# Altium PCB B202AA-PCIe.PcbDoc
Units mm, origin at the board's own origin, x right, y up, seen from the top; angles counter-clockwise.
Board outline 30 x 50.95 mm, 4 copper layers (Top Layer, Int1, Int2, Bottom Layer), stack 1.547 mm thick; 65 components, 43 nets, 237 pads, 132 vias.
Unrouted connection lines stored in the file: 196.
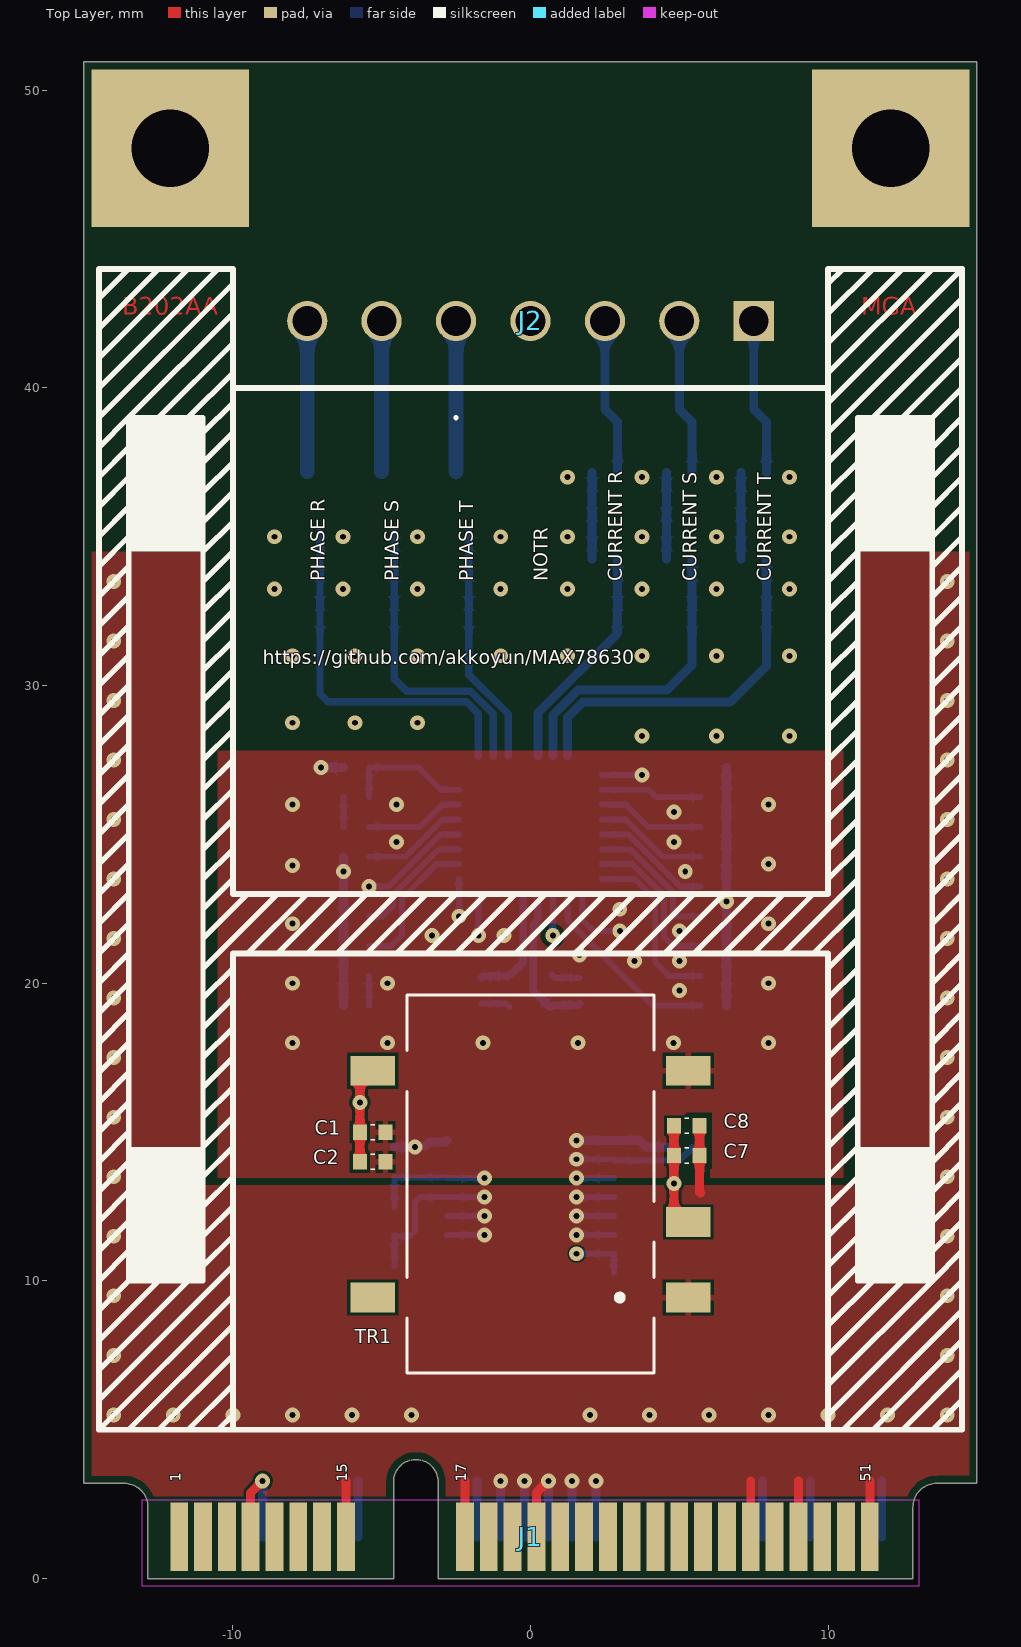
[diagram p0: Top Layer view]
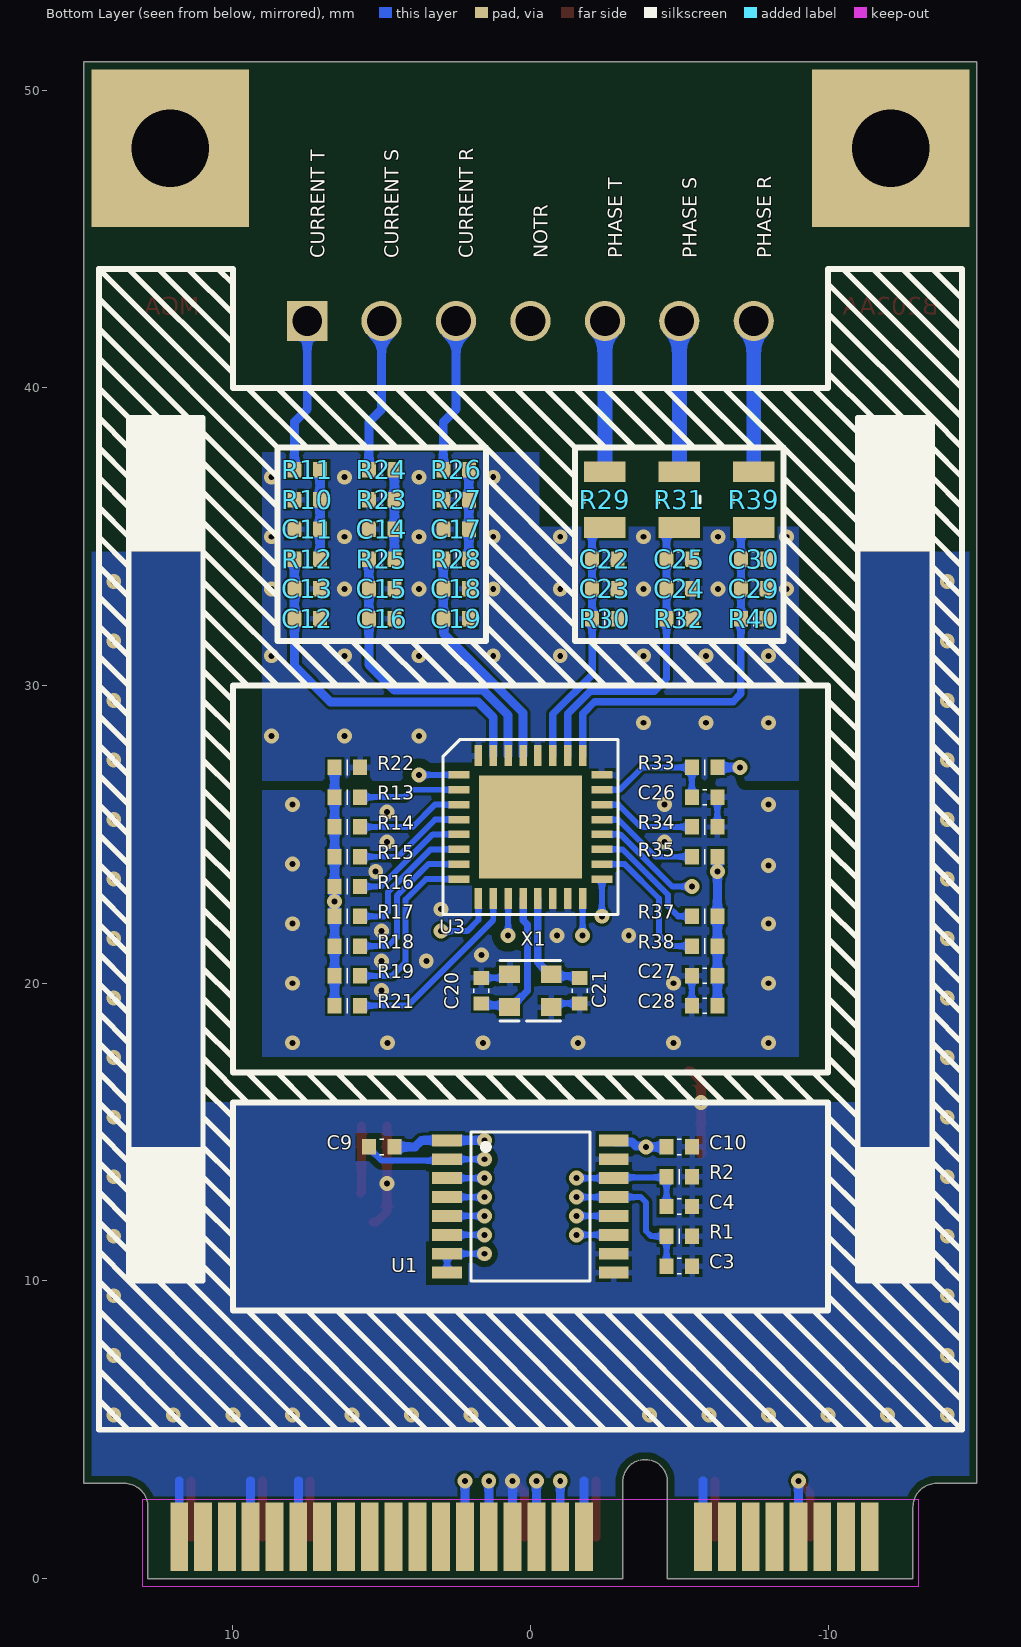
[diagram p1: Bottom Layer view, seen from below]
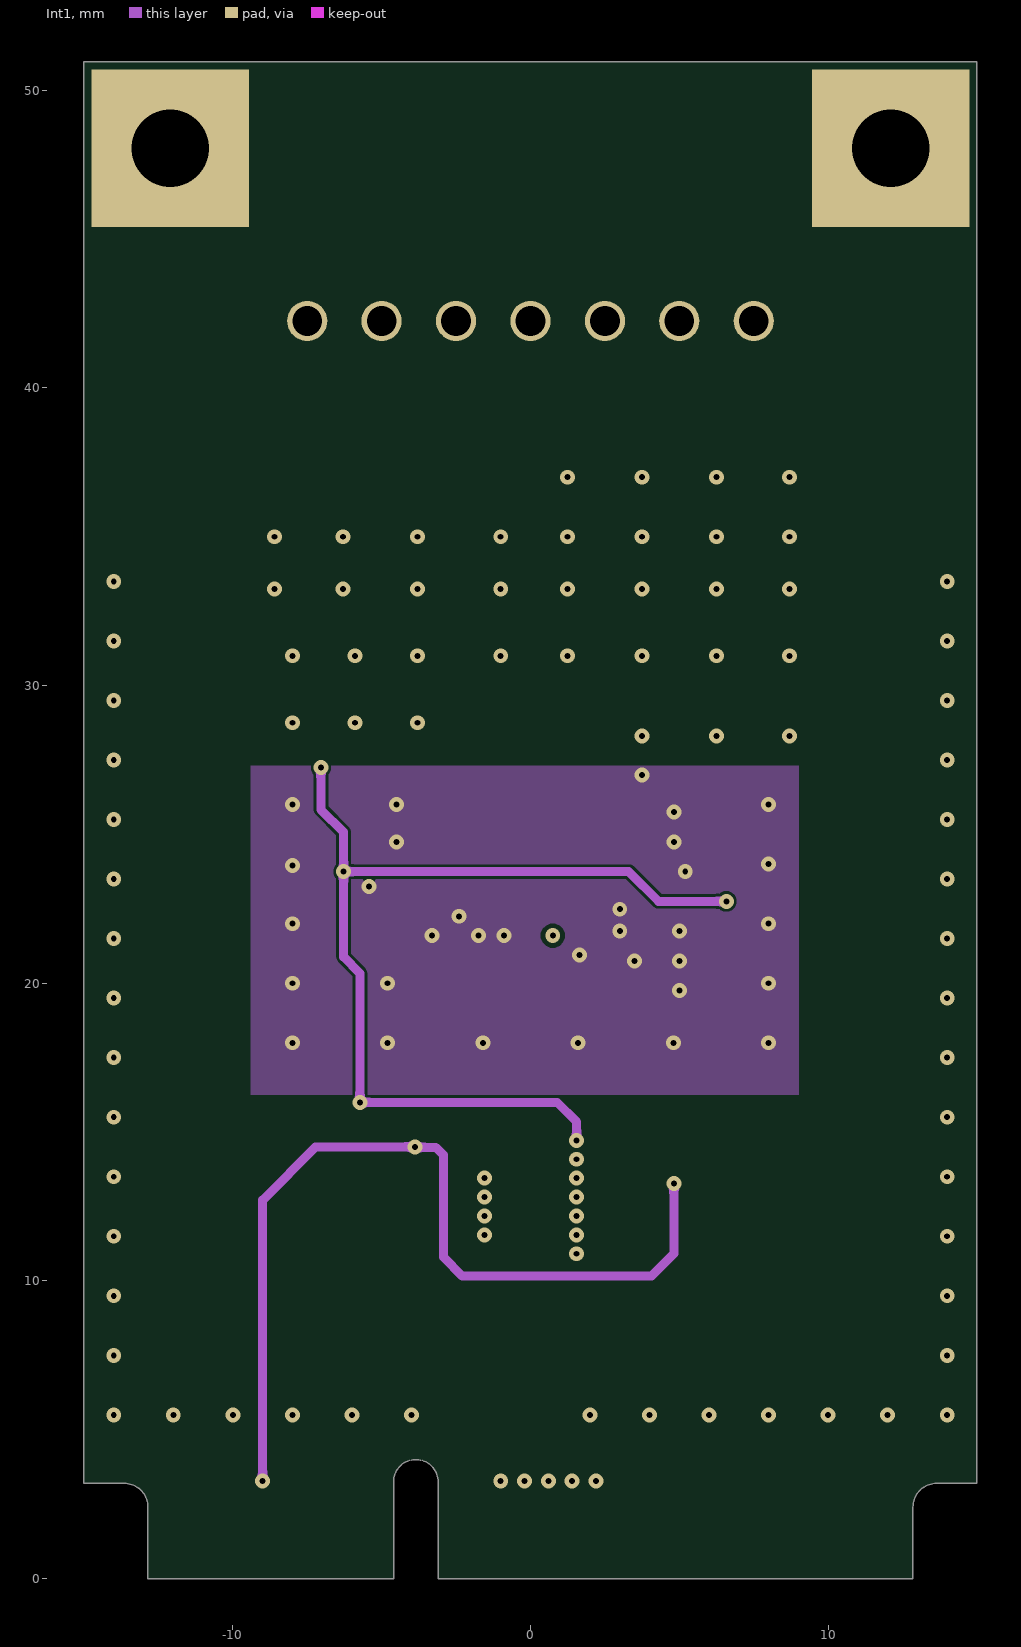
[diagram p2: Int1]
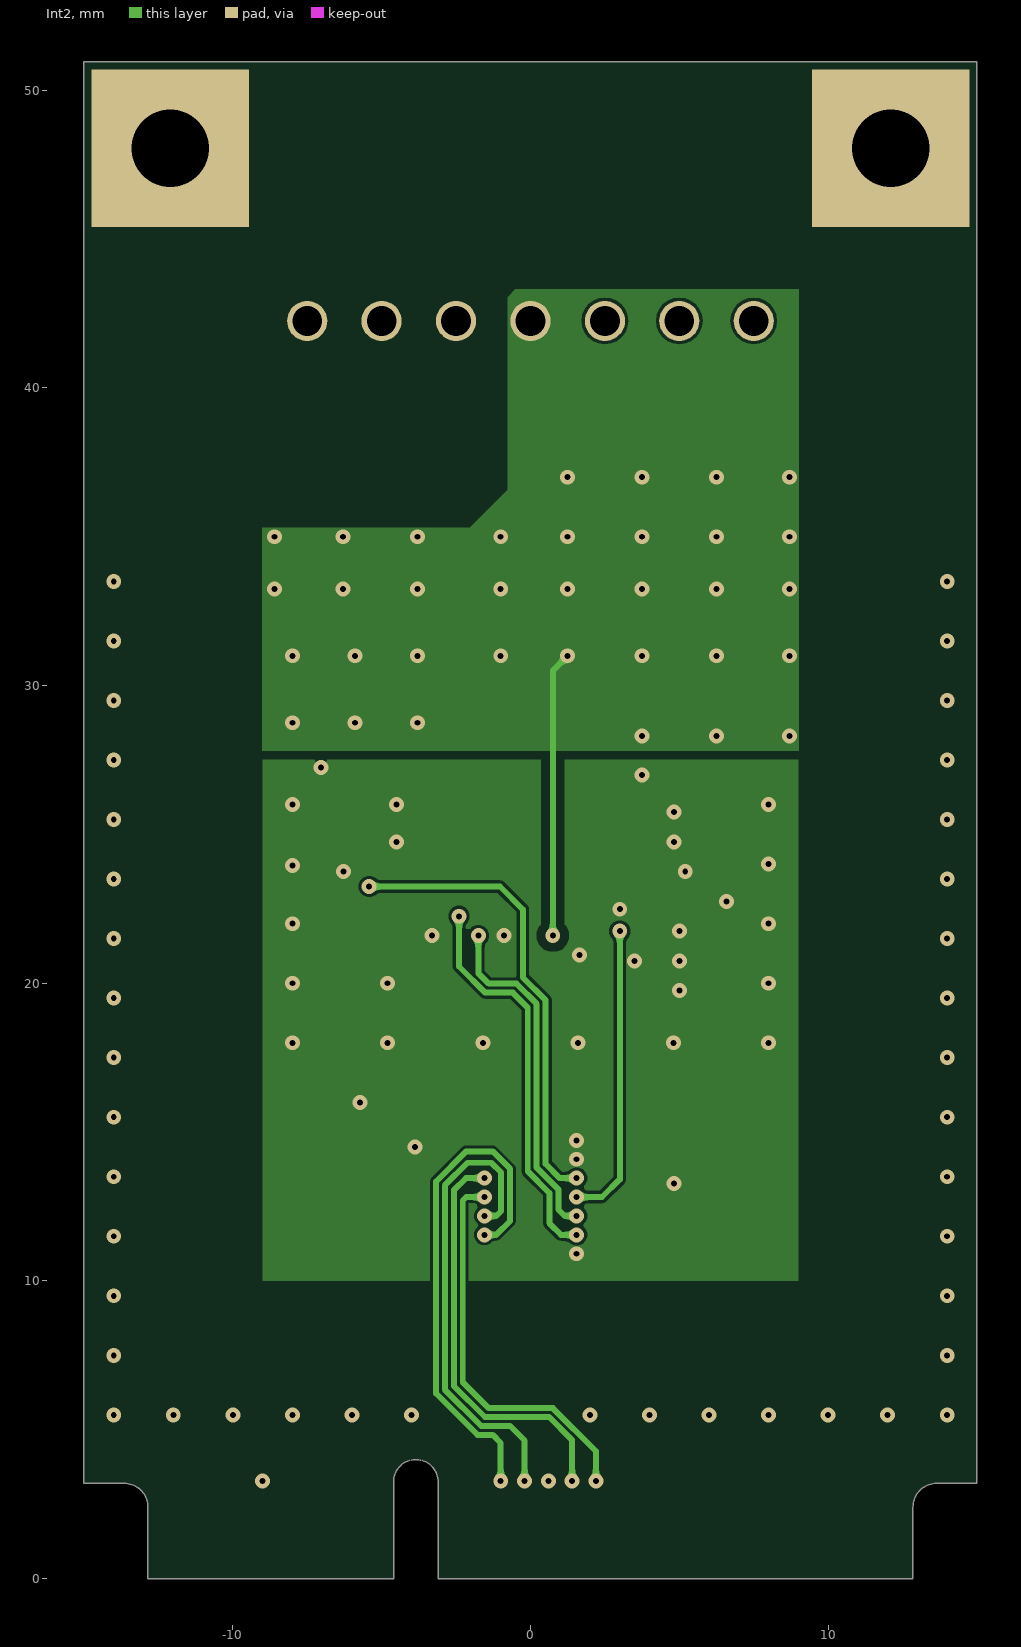
[diagram p3: Int2]
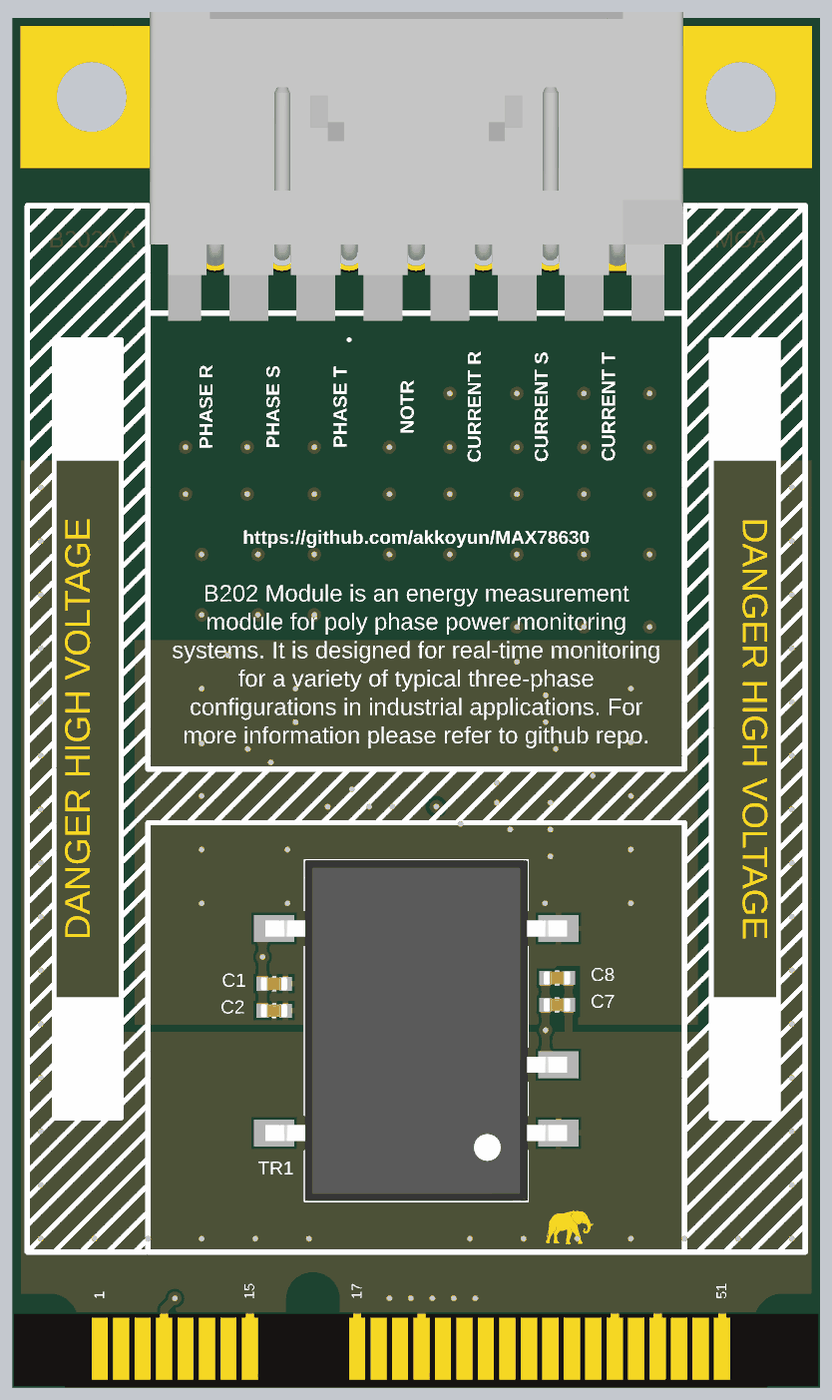
[diagram p4: 3D render of the assembled board from above, using the file's embedded part models]
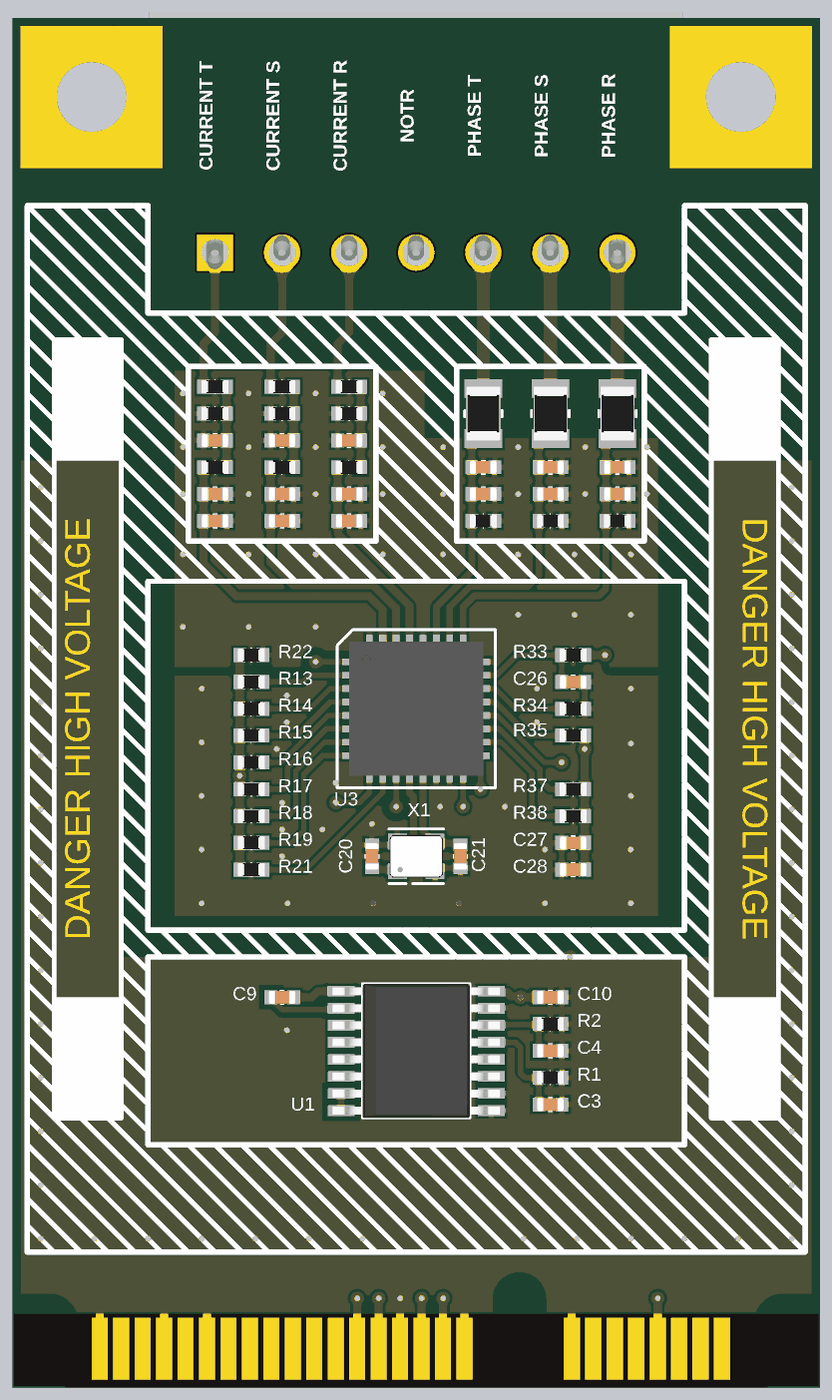
[diagram p5: 3D render of the assembled board from below, using the file's embedded part models]

## Layer stack, top to bottom
Top Solder: solder mask 0.0254, SM-001, Dk 4
Top Layer: signal copper 0.035
Dielectric 1: prepreg 0.2083, PP-022, Dk 4.5
Int1: signal copper 0.035
Dielectric 3: core 0.9906, Core-042, Dk 4.6
Int2: signal copper 0.035
Dielectric 5: prepreg 0.2083, PP-022, Dk 4.5
Bottom Layer: signal copper 0.035
Bottom Solder: solder mask 0.0254, SM-001, Dk 4

## Board outline
-12.85,0 -12.85,2.4 ccw(c-13.65,2.4) -13.65,3.2 -15,3.2 -15,50.95 15,50.95 15,3.2 13.65,3.2 ccw(c13.65,2.4) 12.85,2.4 12.85,0 -3.1,0 -3.1,3.25 ccw(c-3.85,3.25) -4.6,3.25 -4.6,0

## Design rules (kind name [scope] priority, off if disabled: settings)
BoardOutlineClearance [All] p1: gap=0.25 ignorepadtopadclearanceinfootprint=FALSE except(0: Arc-SplitContinuation Track-SplitContinuation SMDPad-SplitContinuation THPad-SplitContinuation Via-SplitContinuation Fill-SplitContinuation Poly-SplitContinuation Region-SplitContinuation Text-SplitContinuation)
Clearance NOTR-GNDISO [InNet('NOTR') vs InNet('GNDISO')] p1: gap=0.3 ignorepadtopadclearanceinfootprint=TRUE
Clearance GND-GNDISO [InNet('GND') vs InNet('GNDISO')] p2: gap=0.2 ignorepadtopadclearanceinfootprint=TRUE
Clearance "HV Clearence" [InNetClass('HV')] p3: gap=0.1 ignorepadtopadclearanceinfootprint=TRUE except(0: Arc-Hole Track-Hole SMDPad-Hole THPad-Hole Via-Hole Fill-Hole Poly-Hole Region-Hole Text-Hole; 1: THPad-Fill THPad-Poly THPad-Region; 1.2: Arc-Arc Arc-Track Track-Track; 1.5: Arc-Fill Arc-Poly Arc-Region Track-Fill Track-Poly Track-Region SMDPad-Fill SMDPad-Poly SMDPad-Region)
Clearance [All] p4: gap=0.1 ignorepadtopadclearanceinfootprint=FALSE except(0: Arc-Hole Track-Hole SMDPad-Hole THPad-Hole Via-Hole Fill-Hole Poly-Hole Region-Hole Text-Hole)
ComponentClearance [All] p1: gap=0.25 collisioncheckmode=3 verticalgap=0.25 showdistances=FALSE
DiffPairsRouting [All] p1: maxlimit=0.25 minlimit=0.25 mostfreqgap=0.25 toplayer_minwidth=0.381 toplayer_maxwidth=0.381 toplayer_prefwidth=0.381 midlayer1_minwidth=0.381 midlayer1_maxwidth=0.381 midlayer1_prefwidth=0.381 midlayer2_minwidth=0.381 midlayer2_maxwidth=0.381 midlayer2_prefwidth=0.381 bottomlayer_minwidth=0.381 bottomlayer_maxwidth=0.381 bottomlayer_prefwidth=0.381 maxuncoupledlength=12.5
Height [All] p1: minheight=0 maxheight=25 prefheight=12.5
HoleSize HoleSize-PTH [All] p1: absolutevalues=TRUE maxlimit=5 minlimit=0.15 maxpercent=80.000 minpercent=20.000
HoleToHoleClearance [All] p1: gap=0.35 allowstackedmicrovias=TRUE
MinimumAnnularRing "Minimum IAR  <= 0.45mm" [((ObjectKind = 'Pad') OR (ObjectKind = 'Via')) And (Layer = 'MultiLayer') And (HoleDiameter <= AsMM(0.45))] p1: minimumring=0.125 // minimum inner annular ring for pads <= 0.45mm finished hole size
MinimumAnnularRing "Minimum IAR  > 0.45mm" [((ObjectKind = 'Pad') OR (ObjectKind = 'Via')) And (Layer = 'MultiLayer') And (HoleDiameter > AsMM(0.45))] p2: minimumring=0.125 // minimum inner annular ring for pads > 0.45mm finished hole size
MinimumAnnularRing Minimum-IAR [All] p3: minimumring=0.125
MinimumSolderMaskSliver [All] p1: minsoldermaskwidth=0.08
PlaneClearance [InNet('ANT_GSM')] p1: clearance=0.05
PlaneClearance PlaneClearance-IPI [All] p2: clearance=0.25
PlaneConnect [All] p1: planeconnectstyle=Relief reliefexpansion=0.175 reliefentries=4 reliefconductorwidth=0.2 reliefairgap=0.1
PolygonConnect PolygonConnect_Via [All vs (ObjectKind = 'Via') And (HoleDiameter <= AsMM(0.45))] p1: connectstyle=Direct reliefconductorwidth=0.254 reliefentries=4 polygonreliefangle="90 Angle" airgapwidth=0.254
PolygonConnect PolygonConnect-xTW [All] p2: connectstyle=Relief reliefconductorwidth=0.2 reliefentries=4 polygonreliefangle="90 Angle" airgapwidth=0.1
RoutingCorners [All] p1: cornerstyle=45-Degree minsetback=2.5 maxsetback=2.5
RoutingVias "RoutingVias <= 0.45mm" [(ObjectKind = 'Via') And (HoleDiameter <= AsMM(0.45))] p1: holewidth=0.2 width=0.55 viastyle="Through Hole" minholewidth=0.15 minwidth=0.5 maxholewidth=0.45 maxwidth=0.8
RoutingVias "RoutingVias > 0.45mm" [(ObjectKind = 'Via') And (HoleDiameter > AsMM(0.45))] p2: holewidth=0.5 width=0.85 viastyle="Through Hole" minholewidth=0.5 minwidth=0.85 maxholewidth=0.9 maxwidth=1.25
SilkToSilkClearance [All] p1: silktosilkclearance=0.2
SilkToSolderMaskClearance SilkscreenOverComponentPads [IsPad] p1: minsilkscreentomaskgap=0.1 clearancetoexposedcopper=TRUE
SolderMaskExpansion SolderMaskExpansion_Via [(ObjectKind = 'Via') And (HoleDiameter <= AsMM(0.45))] p1: expansion=0.01 istentingtop=TRUE soldermaskfromhole=TRUE
SolderMaskExpansion [All] p2: expansion=0.01 istentingtop=FALSE
SupplyNets VT [InNetClass('HV')] p1: voltage=220,0
SupplyNets 3V3 [InNet('3V3')] p2: voltage=3,300
SupplyNets 3V3ISO [InNet('3V3ISO')] p3: voltage=3,300
UnRoutedNet [All] p1: checkbadconnections=TRUE
Width Width-xTW [All] p1: maxlimit=1.5 minlimit=0.1 preferedwidth=0.2
18 further rules are at their usual default settings.

## Classes and differential pairs
net class Analog_Voltage: Analog_VR Analog_VS Analog_VT
component class "MAX78630 SOC": C20 C21 C26 C27 C28 R13 R14 R15 R16 R17 R18 R19 R21 R22 R33 R34 R35 R37 R38 U3 X1
net class HV: VR VS VT
component class "Serial Comm Isolation": C3 C4 C9 C10 R1 R2 U1
component class "Voltage Dividers": C22 C23 C24 C25 C29 C30 R29 R30 R31 R32 R39 R40
component class "DC/DC Isolation": C1 C2 C7 C8
component class "Current Voltage Dividers": C11 C12 C13 C14 C15 C16 C17 C18 C19 R10 R11 R12 R23 R24 R25 R26 R27 R28
component class "Card Edge Connector": J1
component class "3 Phase Energy Inputs": J2

## Components (designator, comment, footprint, x,y, rotation, side; value= is the part's Value field where it differs from the comment)
C1 "Capacitor - 4.7uF [0402] (Ceramic)" CAPACITOR_0402 -5.3,15 r180 top value=4.7uF
C2 "Capacitor - 100nF [0402] (Ceramic)" CAPACITOR_0402 -5.3,14 r180 top value=100nF
C3 "Capacitor - 100nF [0402] (Ceramic)" CAPACITOR_0402 -5,10.5 r0 bottom value=100nF
C4 "Capacitor - 100nF [0402] (Ceramic)" CAPACITOR_0402 -5,12.5 r0 bottom value=100nF
C7 "Capacitor - 100nF [0402] (Ceramic)" CAPACITOR_0402 5.25,14.213 r180 top value=100nF
C8 "Capacitor - 100nF [0402] (Ceramic)" CAPACITOR_0402 5.25,15.213 r180 top value=100nF
C9 "Capacitor - 100nF [0402] (Ceramic)" CAPACITOR_0402 5,14.5 r180 bottom value=100nF
C10 "Capacitor - 100nF [0402] (Ceramic)" CAPACITOR_0402 -5,14.5 r0 bottom value=100nF
C11 "Capacitor - 100nF [0402] (Ceramic)" CAPACITOR_0402 7.5,35.25 r180 bottom value=100nF
C12 "Capacitor - 1nF [0402] (Ceramic)" CAPACITOR_0402 7.5,32.25 r0 bottom value=1nF
C13 "Capacitor - 47nF [0402] (Ceramic)" CAPACITOR_0402 7.5,33.25 r0 bottom value=47nF
C14 "Capacitor - 100nF [0402] (Ceramic)" CAPACITOR_0402 5,35.25 r180 bottom value=100nF
C15 "Capacitor - 47nF [0402] (Ceramic)" CAPACITOR_0402 5,33.25 r0 bottom value=47nF
C16 "Capacitor - 1nF [0402] (Ceramic)" CAPACITOR_0402 5,32.25 r0 bottom value=1nF
C17 "Capacitor - 100nF [0402] (Ceramic)" CAPACITOR_0402 2.5,35.25 r180 bottom value=100nF
C18 "Capacitor - 47nF [0402] (Ceramic)" CAPACITOR_0402 2.5,33.25 r0 bottom value=47nF
C19 "Capacitor - 1nF [0402] (Ceramic)" CAPACITOR_0402 2.5,32.25 r0 bottom value=1nF
C20 "Capacitor - 8pF [0402] (Ceramic)" CAPACITOR_0402 1.65,19.75 r270 bottom value=8pF
C21 "Capacitor - 8pF [0402] (Ceramic)" CAPACITOR_0402 -1.65,19.75 r90 bottom value=8pF
C22 "Capacitor - 1nF [0402] (Ceramic)" CAPACITOR_0402 -2.5,34.25 r0 bottom value=1nF
C23 "Capacitor - 100nF [0402] (Ceramic)" CAPACITOR_0402 -2.5,33.25 r0 bottom value=100nF
C24 "Capacitor - 100nF [0402] (Ceramic)" CAPACITOR_0402 -5,33.25 r0 bottom value=100nF
C25 "Capacitor - 1nF [0402] (Ceramic)" CAPACITOR_0402 -5,34.25 r0 bottom value=1nF
C26 "Capacitor - 100nF [0402] (Ceramic)" CAPACITOR_0402 -5.85,26.25 r0 bottom value=100nF
C27 "Capacitor - 100nF [0402] (Ceramic)" CAPACITOR_0402 -5.85,20.25 r180 bottom value=100nF
C28 "Capacitor - 100nF [0402] (Ceramic)" CAPACITOR_0402 -5.85,19.25 r180 bottom value=100nF
C29 "Capacitor - 100nF [0402] (Ceramic)" CAPACITOR_0402 -7.5,33.25 r0 bottom value=100nF
C30 "Capacitor - 1nF [0402] (Ceramic)" CAPACITOR_0402 -7.5,34.25 r0 bottom value=1nF
J1 "Connector - Mini PCI-E (Male B202AA-PCIe)" "PCB - Mini PCI Express" -3.85,3.25 r0 top
J2 "53426-0710" "Connector 7P (2.54)" 0,42.25 r180 top locked
R1 "10K - 0402 - %1 - 1/16W" RESISTOR_0402 -5,11.5 r0 bottom value=10K
R2 "10K - 0402 - %1 - 1/16W" RESISTOR_0402 -5,13.5 r0 bottom value=10K
R10 "4R99 - 0402 - %1 - 1/16W" RESISTOR_0402 7.5,36.25 r180 bottom value=4R99
R11 "0R - 0402 - %1 - 1/16W" RESISTOR_0402 7.5,37.25 r0 bottom value=0R
R12 "750R - 0402 - %1 - 1/16W" RESISTOR_0402 7.5,34.25 r180 bottom value=750R
R13 "10K - 0402 - %1 - 1/16W" RESISTOR_0402 6.15,26.25 r180 bottom value=10K
R14 "10K - 0402 - %1 - 1/16W" RESISTOR_0402 6.15,25.25 r0 bottom value=10K
R15 "10K - 0402 - %1 - 1/16W" RESISTOR_0402 6.15,24.25 r180 bottom value=10K
R16 "10K - 0402 - %1 - 1/16W" RESISTOR_0402 6.15,23.25 r180 bottom value=10K
R17 "10K - 0402 - %1 - 1/16W" RESISTOR_0402 6.15,22.25 r0 bottom value=10K
R18 "10K - 0402 - %1 - 1/16W" RESISTOR_0402 6.15,21.25 r180 bottom value=10K
R19 "10K - 0402 - %1 - 1/16W" RESISTOR_0402 6.15,20.25 r180 bottom value=10K
R21 "10K - 0402 - %1 - 1/16W" RESISTOR_0402 6.15,19.25 r180 bottom value=10K
R22 "0R - 0402 - %1 - 1/16W" RESISTOR_0402 6.15,27.25 r0 bottom value=0R
R23 "4R99 - 0402 - %1 - 1/16W" RESISTOR_0402 5,36.25 r180 bottom value=4R99
R24 "0R - 0402 - %1 - 1/16W" RESISTOR_0402 5,37.25 r0 bottom value=0R
R25 "750R - 0402 - %1 - 1/16W" RESISTOR_0402 5,34.25 r180 bottom value=750R
R26 "0R - 0402 - %1 - 1/16W" RESISTOR_0402 2.5,37.25 r0 bottom value=0R
R27 "4R99 - 0402 - %1 - 1/16W" RESISTOR_0402 2.5,36.25 r180 bottom value=4R99
R28 "750R - 0402 - %1 - 1/16W" RESISTOR_0402 2.5,34.25 r180 bottom value=750R
R29 "2M - 0805 - %0.1 - 1/5W" RESISTOR_0805 -2.5,36.25 r90 bottom value=2M
R30 "750R - 0402 - %0.1 - 1/16W" RESISTOR_0402 -2.5,32.25 r0 bottom value=750R
R31 "2M - 0805 - %0.1 - 1/5W" RESISTOR_0805 -5,36.25 r90 bottom value=2M
R32 "750R - 0402 - %0.1 - 1/16W" RESISTOR_0402 -5,32.25 r0 bottom value=750R
R33 "10K - 0402 - %1 - 1/16W" RESISTOR_0402 -5.85,27.25 r0 bottom value=10K
R34 "10K - 0402 - %1 - 1/16W" RESISTOR_0402 -5.85,25.25 r0 bottom value=10K
R35 "10K - 0402 - %1 - 1/16W" RESISTOR_0402 -5.85,24.25 r0 bottom value=10K
R37 "10K - 0402 - %1 - 1/16W" RESISTOR_0402 -5.85,22.25 r0 bottom value=10K
R38 "10K - 0402 - %1 - 1/16W" RESISTOR_0402 -5.85,21.25 r180 bottom value=10K
R39 "2M - 0805 - %0.1 - 1/5W" RESISTOR_0805 -7.5,36.25 r90 bottom value=2M
R40 "750R - 0402 - %0.1 - 1/16W" RESISTOR_0402 -7.5,32.25 r0 bottom value=750R
TR1 "PDS1-S3-S3-M" PDS1-Sx-Sx-M 0,13.25 r180 top locked
U1 "ISO7041" SSOP-16 0,12.5 r180 bottom
U3 "MAX78630+PPM/D00" "TQFN-32 - Maxim" 0,25.25 r270 bottom
X1 "CX2016DB20000D0GPSC1" "CRYSTAL - 20MHz" 0,19.75 r90 bottom

## Footprints (in the part's own frame and the unit in brackets; to place one, negate y for a bottom-side part, rotate by r counter-clockwise, add the part's x,y. Pads: shape width x height; smd on the part's side, far side on the other; paste and mask are expansions set on the pad)
CAPACITOR_0402 [mm] "Chip Capacitor, IPC High Density"
  rect 0.47x0.52 smd mask+0.01: 1(-0.43,0) 2(0.43,0)
  silkscreen extent -0.06,-0.25 0.06,0.25, body extent -0.5,-0.25 0.5,0.25, height 0.49
"Connector 7P (2.54)" [mm] "7P Tunic Connector"
  rect 1.35x1.35 / inner round 1.35 / far side rect 1.35x1.35 hole 1 mask+0.076: 1(-7.5,0)
  round 1.35 hole 1 mask+0.076: 2(-5,0) 3(-2.5,0) 4(0,0) 5(2.5,0) 6(5,0) 7(7.5,0)
  body extent -9.96,-8.96 9.94,2.54, height 6.65
"CRYSTAL - 20MHz" [mm] "X2016DB20000D0FLJCC"
  rect 0.6x0.7 smd mask+0.01: 1(-0.55,0.7) 2(-0.55,-0.7) 3(0.55,-0.7) 4(0.55,0.7)
  silkscreen extent -1.02,-1.02 1.02,1.02, body extent -0.8,-1 0.8,1, height 0.4
"PCB - Mini PCI Express" [mm]
  rect 0.6x2.3 smd paste-0.9: 1(-7.95,-1.85) 3(-7.15,-1.85) 5(-6.35,-1.85) 7(-5.55,-1.85) 9(-4.75,-1.85) 11(-3.95,-1.85) 13(-3.15,-1.85) 15(-2.35,-1.85) 17(1.65,-1.85) 19(2.45,-1.85) 21(3.25,-1.85) 23(4.05,-1.85) 25(4.85,-1.85) 27(5.65,-1.85) 29(6.45,-1.85) 31(7.25,-1.85) 33(8.05,-1.85) 35(8.85,-1.85) 37(9.65,-1.85) 39(10.45,-1.85) 41(11.25,-1.85) 43(12.05,-1.85) 45(12.85,-1.85) 47(13.65,-1.85) 49(14.45,-1.85) 51(15.25,-1.85)
  rect 0.6x2.3 smd far side paste-0.9: 2(-7.55,-1.85) 4(-6.75,-1.85) 6(-5.95,-1.85) 8(-5.15,-1.85) 10(-4.35,-1.85) 12(-3.55,-1.85) 14(-2.75,-1.85) 16(-1.95,-1.85) 18(2.05,-1.85) 20(2.85,-1.85) 22(3.65,-1.85) 24(4.45,-1.85) 26(5.25,-1.85) 28(6.05,-1.85) 30(6.85,-1.85) 32(7.65,-1.85) 34(8.45,-1.85) 36(9.25,-1.85) 38(10.05,-1.85) 40(10.85,-1.85) 42(11.65,-1.85) 44(12.45,-1.85) 46(13.25,-1.85) 48(14.05,-1.85) 50(14.85,-1.85) 52(15.65,-1.85)
  Top Layer keep-out region: -9.2,-0.6 16.9,-0.6 16.9,-3.5 -9.2,-3.5
  Bottom Layer keep-out region: -9.2,-0.6 16.9,-0.6 16.9,-3.5 -9.2,-3.5
PDS1-Sx-Sx-M [mm] "Voltage Isolator"
  rect 1.5x1 smd mask+0.01: 1(-5.3,3.81) 2(-5.3,1.27) 4(-5.3,-3.81) 5(5.3,-3.81) 8(5.3,3.81)
  silkscreen extent -4.15,-6.35 4.15,6.35, body extent -5.62,-6.35 5.62,6.35, height 7.3
RESISTOR_0402 [mm] "Chip Resistor, IPC High Density"
  rect 0.47x0.52 smd mask+0.01: 1(-0.43,0) 2(0.43,0)
  silkscreen extent 0,-0.25 0,0.25, body extent -0.5,-0.25 0.5,0.25, height 0.35
RESISTOR_0805 [mm] "Chip Resistor, IPC High Density"
  rect 0.7x1.4 smd mask+0.01: 1(-0.935,0) 2(0.935,0)
  silkscreen extent -0.12,-0.7 0.12,0.7, body extent -1,-0.63 1,0.63, height 0.45
SSOP-16 [mm]
  rect 1x0.4 smd mask+0.01: 1(-2.8,2.223) 2(-2.8,1.588) 3(-2.8,0.953) 4(-2.8,0.318) 5(-2.8,-0.318) 6(-2.8,-0.953) 7(-2.8,-1.588) 8(-2.8,-2.223) 9(2.8,-2.223) 10(2.8,-1.588) 11(2.8,-0.953) 12(2.8,-0.318) 13(2.8,0.317) 14(2.8,0.953) 15(2.8,1.588) 16(2.8,2.223)
  silkscreen extent -2,-2.5 2,2.5, body extent -3.13,-2.5 3.13,2.5, height 1.75
"TQFN-32 - Maxim" [mm]
  rect 0.25x0.7 smd mask+0.01: 1(-1.75,-2.4) 2(-1.25,-2.4) 3(-0.75,-2.4) 4(-0.25,-2.4) 5(0.25,-2.4) 6(0.75,-2.4) 7(1.25,-2.4) 8(1.75,-2.4) 17(1.75,2.4) 18(1.25,2.4) 19(0.75,2.4) 20(0.25,2.4) 21(-0.25,2.4) 22(-0.75,2.4) 23(-1.25,2.4) 24(-1.75,2.4)
  rect 0.7x0.25 smd mask+0.01: 9(2.4,-1.75) 10(2.4,-1.25) 11(2.4,-0.75) 12(2.4,-0.25) 13(2.4,0.25) 14(2.4,0.75) 15(2.4,1.25) 16(2.4,1.75) 25(-2.4,1.75) 26(-2.4,1.25) 27(-2.4,0.75) 28(-2.4,0.25) 29(-2.4,-0.25) 30(-2.4,-0.75) 31(-2.4,-1.25) 32(-2.4,-1.75)
  rect 3.45x3.45 smd mask+0.01: EP(0,0)
  silkscreen extent -2.95,-2.95 2.95,2.95, body extent -2.5,-2.5 2.5,2.5, height 0.9

## Part data
C1: library part "Capacitor - 4.7uF [0402-6V3]", "Multilayer Ceramic Capacitors - SMD - 6V3 4.7uF X5R 0402 20%", Case=0402, Manufacturer Name=KEMET, Manufacturer Part Number=C0402C475M9PACTU, Tolerance=20%, Voltage=6V3
C2 C3 C4 C7 C8 C9 C10 C11 C14 C17 C23 C24 C26 C27 C28 C29: library part "Capacitor - 100nF [0402-6V3]", "Capacitor - 100nF [0402-6V3] (Ceramic)", Case=0402, Manufacturer Name=AVX, Manufacturer Part Number=04026D104KAT4A, Tolerance=%10, Voltage=6V3, ComponentLink1Description=Mouser, ComponentLink1URL=https://www.mouser.com.tr/ProductDetail/AVX/04026D104KAT4A?qs=sGAEpiMZZMs0AnBnWHyRQPg4iYkCw7IMED%2F4kpqgf7w%3D, ComponentLink2Description=DataSheet, ComponentLink2URL=https://www.mouser.com.tr/datasheet/2/40/cx5r-776519.pdf
C12 C16 C19 C22 C25 C30: library part "Capacitor - 1nF [0402-6V3]", Case=0402, Manufacturer Name=AVX, Manufacturer Part Number=04026C102MAT2A, Tolerance=20%, Voltage=6V3, ComponentLink1Description=DataSheet, ComponentLink1URL=https://www.mouser.com.tr/datasheet/2/40/X7RDielectric-777024.pdf
C13 C15 C18: library part "Capacitor - 47nF [0402-6V3]", "Multilayer Ceramic Capacitors - SMD - 6.3V 47nF X7R 0402 10%", Case=0402, Manufacturer Name=AVX, Manufacturer Part Number=04026C473KAT2A, Tolerance=10%, Voltage=6V3
C20 C21: library part "Capacitor - 8pF [0402-50V]", Case=0402, Manufacturer Name="KYOCERA AVX", Manufacturer Part Number=04025A8R0CAT2A, Tolerance=0.25pF, Voltage=50V
J1: "Mini PCI-Express gold finger connector.", BUS Type="Mini PCI Express", Mating Connector="TE 2041262-1", Number of Positions=52, Pitch="0.8 mm", System=Connector
J2: library part "Connector - Tunic 7P (2.5)", "2.50mm Pitch Mini-Lock Wire-to-Board Header Right Angle Friction and Positive Lock 7 Circuits", Case=TH, Manufacturer Name=Molex, Manufacturer Part Number=53426-0710, Pitch=2.5mm, Position="7 Position", System=Connector
R1 R2 R13 R14 R15 R16 R17 R18 R19 R21 R33 R34 R35 R37 R38: library part "Resistor - 10K [0402]", "Thick Film Resistors - SMD 1/16 W 10 KOhm 1%", Case=0402, Manufacturer Name=Vishay, Manufacturer Part Number=CRCW040210K0FKED, Power=1/16W, Tolerance=%1, ComponentLink1Description=DataSheet, ComponentLink1URL=https://www.mouser.com.tr/datasheet/2/427/dcrcwe3-1762152.pdf, ComponentLink2Description=Mouser, ComponentLink2URL=https://www.mouser.com.tr/ProductDetail/Vishay-Dale/CRCW040210K0FKED?qs=sGAEpiMZZMu61qfTUdNhG2DpbjADlD3GcalbOv9utCY%3D
R10 R23 R27: library part "Resistor - 4R99 [0402]", "Thick Film Resistors - SMD 1/16 W 33 Ohm 1%", Case=0402, Manufacturer Name=Bourns, Manufacturer Part Number=CRT0402-FZ-4R99GLF, Power=1/16W, Tolerance=%1, ComponentLink1Description=DataSheet, ComponentLink1URL=https://www.mouser.com.tr/datasheet/2/427/dcrcwe3-1762152.pdf, ComponentLink2Description=Mouser, ComponentLink2URL=https://www.mouser.com.tr/ProductDetail/Vishay-Dale/CRCW0402330RFKED?qs=sGAEpiMZZMu61qfTUdNhG2DpbjADlD3GGS6SwBlLi5Q%3D
R11 R22 R24 R26: library part "Resistor - 0R [0402]", "Thick Film Resistors - SMD 1/16 W 0 Ohm", Case=0402, Manufacturer Name=Vishay, Manufacturer Part Number=CRCW04020000Z0ED, Power=1/16W, ComponentLink1Description=DataSheet, ComponentLink1URL=https://www.mouser.com.tr/datasheet/2/427/dcrcwe3-1762152.pdf, ComponentLink2Description=Mouser, ComponentLink2URL=https://www.mouser.com.tr/ProductDetail/Vishay-Dale/CRCW04020000Z0ED?qs=sGAEpiMZZMu61qfTUdNhG2DpbjADlD3GG34cJb50zyg%3D
R12 R25 R28: library part "Resistor - 750R [0402]", "Thick Film Resistors - SMD 1/16 W 750 Ohm 1%", Case=0402, Manufacturer Name=Vishay, Manufacturer Part Number=CRCW0402750RFKED, Power=1/16W, Tolerance=%1, ComponentLink1Description=DataSheet, ComponentLink1URL=https://www.mouser.com.tr/datasheet/2/427/dcrcwe3-1762152.pdf, ComponentLink2Description=Mouser, ComponentLink2URL=https://www.mouser.com.tr/ProductDetail/Vishay-Dale/CRCW0402330RFKED?qs=sGAEpiMZZMu61qfTUdNhG2DpbjADlD3GGS6SwBlLi5Q%3D
R29 R31 R39: library part "Resistor - 2M [0805] %0.1", "Thick Film Resistors - SMD 1/5 W 2 MOhm 0.1%", Case=0805, Manufacturer Name=Vishay, Manufacturer Part Number=MCU0805MD2004BP500, Power=1/5W, Tolerance=%0.1, ComponentLink1Description=DataSheet, ComponentLink1URL=https://www.mouser.com.tr/datasheet/2/427/dcrcwe3-1762152.pdf, ComponentLink2Description=Mouser, ComponentLink2URL=https://www.mouser.com.tr/ProductDetail/Vishay-Dale/CRCW0402330RFKED?qs=sGAEpiMZZMu61qfTUdNhG2DpbjADlD3GGS6SwBlLi5Q%3D
R30 R32 R40: library part "Resistor - 750R [0402] %0.1", "Thick Film Resistors - SMD 1/16 W 750 Ohm 0.1%", Case=0402, Manufacturer Name=Vishay, Manufacturer Part Number=MCS04020D7500BE000, Power=1/16W, Tolerance=%0.1, ComponentLink1Description=DataSheet, ComponentLink1URL=https://www.mouser.com.tr/datasheet/2/427/dcrcwe3-1762152.pdf, ComponentLink2Description=Mouser, ComponentLink2URL=https://www.mouser.com.tr/ProductDetail/Vishay-Dale/CRCW0402330RFKED?qs=sGAEpiMZZMu61qfTUdNhG2DpbjADlD3GGS6SwBlLi5Q%3D
TR1: library part "Transformator - PDS1-Sx-Sx-M", "Module DC-DC 3.3VIN 1-OUT 3.3V 0.303A 1W 5-Pin SMD Module", Case=SMD, Manufacturer Name="CUI Inc.", Output Current="303 mA", Output Voltage=3V3, Manufacturer Part Number=PDS1-S3-S3-M
U1: library part "IC - ISO7041", "Digital Isolators Ultra-low power, ATEX/IECEx-certified, four-channel digital isolator 16-SSOP -55 to 125", Case=SSOP-16, Manufacturer Name="Texas Instruments", Manufacturer Part Number=ISO7041FDBQR, Operating Supply Current="115.7 uA", Supply Voltage - Max="3.6 V", Supply Voltage - Min="2.25 V", Isolation Voltage="3000 Vrms", Isolation Type="Capacitive Coupling"
U3: library part "IC - MAX78630", "Energy Measurement Processor 32-Pin TQFN EP Tube", Case=TQFN-32, Manufacturer Name=Silergy, Manufacturer Part Number=MAX78630+PPM/D00, ROHS=Yes
X1: library part "Crystal - 20MHz", "Crystals AEC-Q200 20000kHz 8pF 2x1.6mm", Case=SMD, Frequency="20 MHz", Manufacturer Name="Kyocera Electronic Components", Manufacturer Part Number=CX2016DB20000D0GPSC1

## Free pads (board coordinates)
  rect 5.3x5.3 hole 2.6: 1(-12.1,48.05) 2(12.1,48.05)

## Via types
v1: diameter 0.5, hole 0.2, Top Layer to Bottom Layer, tented both sides, 132 vias

## Nets (pads, with @x,y where several pads share a name; then routed paths per layer and width w, separated by ;. In a path a pad name is that pad's centre, name@x,y a point inside that pad or via, vN(x,y) a via of type N, cw(c..) or ccw(c..) an arc to the next point about the centre after c; other vN are vias at no path point)
3V3: C7.2 C8.2 C10.2 J1.7 J1.8 TR1.2 U1.16 | length 39.8
  Top Layer w0.3: J1.7 -9.4,2.879 v1(-9,3.279) ; C8.2 C7.2 v1(4.82,13.272) 4.82,12.33 5.17,11.98 TR1.2
  Int1 w0.3: v1(-9,3.279) -9,12.717 -7.217,14.5 v1(-3.885,14.5) -3.873,14.488 -3.185,14.488 -2.921,14.224 -2.921,10.795 -2.286,10.16 4.064,10.16 4.82,10.916 v1(4.82,13.272)
  Bottom Layer w0.3: J1.8 v1(-9,3.279) ; C10.2 v1(-3.885,14.5) -3.847,14.538 -3.538,14.538 -3.403,14.673 -2.85,14.673 U1.16
3V3_AL1: C4.2 J1.26 R2.2 U1.14 | length 19.8
  Int2 w0.2: v1(-1.55,13.453) -2.168,13.453 -2.575,13.046 -2.575,6.472 -1.529,5.426 0.627,5.426 1.4,4.653 v1(1.4,3.279)
  Bottom Layer w0.2: C4.2 R2.2 -4.547,13.477 -2.823,13.477 U1.14 v1(-1.55,13.453)
  Bottom Layer w0.3: J1.26 v1(1.4,3.279)
3V3_AL2: C3.2 J1.28 R1.2 U1.13 | length 20.3
  Int2 w0.2: v1(-1.55,12.818) -2.158,12.818 -2.275,12.7 -2.275,6.596 -1.405,5.726 0.751,5.726 2.2,4.277 v1(2.2,3.279)
  Bottom Layer w0.2: C3.2 R1.2@-4.57,11.525 ; R1.2 -4.055,11.5 -3.879,11.676 -3.879,12.642 -3.704,12.818 U1.13 v1(-1.55,12.818)
  Bottom Layer w0.3: J1.28 v1(2.2,3.279)
3V3_UART_RX: J1.20 U1.11 | length 20.3
  Int2 w0.2: v1(-1.55,11.547) -1.153,11.547 -0.685,12.015 -0.685,13.766 -1.27,14.351 -2.159,14.351 -3.175,13.335 -3.175,6.223 -1.778,4.826 -1.27,4.826 -1,4.556 v1(-1,3.279)
  Bottom Layer w0.2: U1.11 v1(-1.55,11.547)
  Bottom Layer w0.3: J1.20 v1(-1,3.279)
3V3_UART_TX: J1.22 U1.12 | length 19
  Int2 w0.2: v1(-1.55,12.182) -1.153,12.182 -0.985,12.35 -0.985,13.642 -1.313,13.97 -2.116,13.97 -2.875,13.211 -2.875,6.347 -1.654,5.126 -0.681,5.126 -0.2,4.645 v1(-0.2,3.279)
  Bottom Layer w0.2: U1.12 v1(-1.55,12.182)
  Bottom Layer w0.3: J1.22 v1(-0.2,3.279)
3V3ISO: C1.2 C2.2 C9.2 C27.2 C28.2 R13.1 R14.2 R15.1 R16.1 R17.2 R18.1 R19.1 R21.1 R22.2 R33.1 R35.1 R37.1 R38.2 TR1.5 U1.1 | length 53.1
  Top Layer w0.3: C2.2@-5.73,14.25 C1.2 v1(-5.73,16) -5.73,16.71 -5.38,17.06 TR1.5
  Int1 w0.3: v1(-7.04,27.25) -7.04,25.836 -6.28,25.076 v1(-6.28,23.75) ; v1(1.55,14.723) 1.55,15.341 0.891,16 v1(-5.73,16) -5.73,20.335 -6.28,20.885 v1(-6.28,23.75) ; v1(6.58,22.75) 4.301,22.75 3.301,23.75 v1(-6.28,23.75)
  Bottom Layer w0.3: v1(-7.04,27.25) R33.1 ; C28.2 C27.2 R38.2 R37.1 v1(-6.28,23.75) R35.1 ; v1(1.55,14.723) U1.1 3.656,14.723 3.879,14.5 C9.2 ; R21.1 R22.2
ADDR0: R38.1 U3.18 | length 4.9
  Bottom Layer w0.2: R38.1 -4.692,21.25 -4.318,21.624 -4.318,22.848 -3.166,24 U3.18
ADDR1: R17.1 U3.6 | length 4.6
  Bottom Layer w0.2: U3.6 3.353,24.5 4.791,23.062 4.791,22.387 4.928,22.25 R17.1
Analog_IR: C18.2 C19.2 R28.1 U3.29 | length 7.7
  Bottom Layer w0.3: U3.29 0.25,29.079 2.91,31.739 2.91,32.14 2.93,32.16 C18.2 R28.1
Analog_IR_: C17.2 R26.1 R27.2 R28.2 | length 2.9
  Bottom Layer w0.3: R28.2 C17.2 R26.1@2.07,37.154
Analog_IS: C15.2 C16.2 R25.1 U3.30 | length 10.3
  Bottom Layer w0.3: U3.30 0.75,29.002 1.593,29.845 4.572,29.845 5.43,30.703 C16.2 C15.2 R25.1
Analog_IS_: C14.2 R23.2 R24.1 R25.2 | length 2.9
  Bottom Layer w0.3: R25.2 C14.2 R24.1@4.57,37.154
Analog_IT: C12.2 C13.2 R12.1 U3.31 | length 12.3
  Bottom Layer w0.3: U3.31 1.25,28.936 1.759,29.445 6.712,29.445 7.93,30.663 C12.2 C13.2 R12.1
Analog_IT_: C11.2 R10.2 R11.1 R12.2 | length 2.9
  Bottom Layer w0.3: R12.2 C11.2 R11.1@7.07,37.154
Analog_VR: C29.2 C30.2 R39.1 R40.2 U3.25 | length 12.5
  Bottom Layer w0.25: R39.1@-7.07,35.225 C30.2 C29.2 R40.2 -7.07,29.724 -6.81,29.464 -2.159,29.464 -1.75,29.055 U3.25
Analog_VS: C24.2 C25.2 R31.1 R32.2 U3.26 | length 10.2
  Bottom Layer w0.25: R31.1@-4.57,35.225 C25.2 C24.2 R32.2 -4.57,30.224 -4.16,29.814 -2.014,29.814 -1.25,29.05 U3.26
Analog_VT: C22.2 C23.2 R29.1 R30.2 U3.27 | length 8.1
  Bottom Layer w0.25: R29.1@-2.07,35.225 C22.2 C23.2 R30.2 -2.07,30.365 -0.75,29.045 U3.27
GND: C3.1 C4.1 C7.1 C8.1 C10.1 J1.15 J1.16 J1.17 J1.18 J1.23 J1.24 J1.41 J1.42 J1.45 J1.46 J1.51 J1.52 R1.1 R2.1 TR1.1 U1.9 U1.10 U1.15 | length 25
  Top Layer w0.3: J1.15 -6.2,3.279 ; J1.17 -2.2,3.279 ; J1.23 0.2,2.879 v1(0.6,3.279) ; C8.1 C7.1 5.68,12.989 5.715,12.954 ; J1.41 7.4,3.279 ; J1.45 9,3.279 ; J1.51 11.4,3.279
  Bottom Layer w0.3: J1.16 -5.8,3.279 ; J1.18 -1.8,3.279 ; J1.24 v1(0.6,3.279) ; J1.42 7.8,3.279 ; J1.46 9.4,3.279 ; J1.52 11.8,3.279
  other v1: -14,5.5 -12,5.5 -10,5.5 -8,5.5 -6,5.5 -4,5.5 2,5.5 4,5.5 6,5.5 8,5.5 10,5.5 12,5.5 14,5.5 -14,7.5 14,7.5 -14,9.5 14,9.5 -14,11.5 14,11.5 -14,13.5 14,13.5 -14,15.5 14,15.5 -14,17.5 14,17.5 -14,19.5 14,19.5 -14,21.5 14,21.5 -14,23.5 14,23.5 -14,25.5 14,25.5 -14,27.5 14,27.5 -14,29.5 14,29.5 -14,31.5 14,31.5 -14,33.5 14,33.5
GNDISO: C1.1 C2.1 C9.1 C20.1 C21.1 C26.1 C27.1 C28.1 R34.1 TR1.4 U1.2 U1.7 U1.8 U3.1 U3.14 U3.15 X1.2 X1.4 | length 11.3
  Bottom Layer w0.2: R34.1 C26.1 ; C28.1 C27.1 ; C21.1 -0.82,19.32 X1.2 ; X1.4 0.82,20.18 C20.1 ; v1(1.55,10.912) U1.7 U1.8 ; v1(1.55,14.088) U1.2 2.848,14.04 4.995,14.04 5.43,14.475 C9.1 ; U3.1 v1(3.75,27)
  other v1: -8,18 -4.8,18 -1.6,18 1.6,18 4.8,18 8,18 5,19.75 -8,20 -4.8,20 8,20 3.5,20.75 5,20.75 1.651,20.955 -3.302,21.6 -0.889,21.6 5,21.75 -8,22 8,22 3,22.487 5.2,23.75 -8,23.952 8,24 -4.5,24.75 4.826,24.75 4.826,25.75 -8,26 -4.5,26 8,26
I\S\O\_\A\L\4\: R15.2 U3.4 | length 3.8
  Bottom Layer w0.2: U3.4 3.202,25.5 4.452,24.25 R15.2
I\S\O\_\A\L\5\: R35.2 U3.21 | length 3.5
  Bottom Layer w0.2: R35.2 -4.198,24.25 -2.948,25.5 U3.21
I\S\O\_\D\I\O\1\1\: R37.2 U3.19 | length 4.2
  Bottom Layer w0.2: R37.2 -4.962,22.25 -4.618,22.594 -4.618,22.973 -3.091,24.5 U3.19
I\S\O\_\D\I\O\1\2\: R21.2 U3.10 | length 6.4
  Bottom Layer w0.2: U3.10 1.25,22.118 4.118,19.25 R21.2
I\S\O\_\D\I\O\1\3\: R18.2 U3.7 | length 5.3
  Bottom Layer w0.2: U3.7 3.429,24 4.491,22.938 4.491,21.544 4.785,21.25 R18.2
I\S\O\_\D\I\O\1\4\: R16.2 U3.5 | length 4
  Bottom Layer w0.2: U3.5 3.278,25 5.028,23.25 R16.2
I\S\O\_\D\I\O\1\5\: R13.2 U3.2 | length 3.4
  Bottom Layer w0.2: U3.2 3.98,26.5 4.23,26.25 R13.2
I\S\O\_\D\I\O\5\: R19.2 U3.8 | length 5.9
  Bottom Layer w0.2: U3.8 3.505,23.5 4.191,22.814 4.191,20.701 4.642,20.25 R19.2
I\S\O\_\R\E\S\E\T\: C26.2 R33.2 U3.23 | length 4.3
  Bottom Layer w0.2: C26.2 R33.2 -3.755,27.25 -3.005,26.5 U3.23
IFC0: R14.1 U3.3 | length 3.6
  Bottom Layer w0.2: U3.3 3.21,26 3.96,25.25 R14.1
IFC1: R34.2 U3.22 | length 3.3
  Bottom Layer w0.2: R34.2 -3.706,25.25 -2.956,26 U3.22
IR: J2.3 R26.2 | length 5.3
  Bottom Layer w0.3: J2.3 2.5,39.283 2.93,38.853 R26.2@2.93,37.154
IS: J2.2 R24.2 | length 5.3
  Bottom Layer w0.3: J2.2 5,39.283 5.43,38.853 R24.2@5.43,37.154
ISO_AL1: U1.3 U3.20 | length 20.6
  Int2 w0.2: v1(-5.42,23.25) -1.025,23.25 -0.254,22.479 -0.254,20.193 0.508,19.431 0.508,13.93 0.984,13.453 v1(1.55,13.453)
  Bottom Layer w0.2: v1(-5.42,23.25) -4.765,23.25 -3.015,25 U3.20 ; v1(1.55,13.453) U1.3
ISO_AL2: U1.4 U3.9 | length 13.4
  Int2 w0.2: v1(1.55,12.818) 2.404,12.818 3,13.414 v1(3,21.75)
  Bottom Layer w0.2: v1(1.55,12.818) U1.4 ; U3.9 1.75,22.126 2.126,21.75 v1(3,21.75)
ISO_UART_RX: U1.6 U3.17 | length 15.7
  Int2 w0.2: v1(-2.4,22.25) -2.4,20.561 -1.524,19.685 -0.595,19.685 -0.092,19.182 -0.092,13.681 0.635,12.954 0.635,11.938 1.026,11.547 v1(1.55,11.547)
  Bottom Layer w0.2: v1(-2.4,22.25) U3.17 ; v1(1.55,11.547) U1.6
ISO_UART_TX: U1.5 U3.16 | length 14.1
  Int2 w0.2: v1(-1.75,21.6) -1.75,20.335 -1.4,19.985 -0.47,19.985 0.208,19.307 0.208,13.805 0.935,13.078 0.935,12.4 1.153,12.182 v1(1.55,12.182)
  Bottom Layer w0.2: v1(-1.75,21.6) U3.16 ; v1(1.55,12.182) U1.5
IT: J2.1 R11.2 | length 5.3
  Bottom Layer w0.3: J2.1 7.5,39.283 7.93,38.853 R11.2@7.93,37.154
NOTR: C11.1 C12.1 C13.1 C14.1 C15.1 C16.1 C17.1 C18.1 C19.1 C22.1 C23.1 C24.1 C25.1 C29.1 C30.1 J2.4 R10.1 R22.1 R23.1 R27.1 R30.1 R32.1 R40.1 U3.11 U3.24 U3.28 U3.32 | length 10.9
  Int2 w0.2: v1(0.75,21.6) 0.75,30.5 v1(1.25,31)
  Bottom Layer w0.2: v1(0.75,21.6) U3.11
  other v1: 3.75,28.3 6.25,28.3 8.7,28.3 -8,28.751 -5.9,28.751 -3.8,28.751 -8,31 -5.9,31 -3.8,31 -1,31 3.75,31 6.25,31 8.7,31 -8.6,33.25 -6.3,33.25 -3.8,33.25 -1,33.25 1.25,33.25 3.75,33.25 6.25,33.25 8.7,33.25 -8.6,35 -6.3,35 -3.8,35 -1,35 1.25,35 3.75,35 6.25,35 8.7,35 1.25,37 3.75,37 6.25,37 8.7,37
VR: J2.7 R39.2 | length 5.1
  Bottom Layer w0.5: R39.2 J2.7
VS: J2.6 R31.2 | length 5.1
  Bottom Layer w0.5: R31.2 J2.6
VT: J2.5 R29.2 | length 5.1
  Bottom Layer w0.5: R29.2@-2.5,37.185 J2.5
XIN: C20.2 U3.12 X1.1 | length 5
  Bottom Layer w0.25: U3.12 0.25,22.121 0.1,21.971 0.1,19.75 0.65,19.2 X1.1 0.76,19.26 1.59,19.26 C20.2
XOUT: C21.2 U3.13 X1.3 | length 3.8
  Bottom Layer w0.25: C21.2 -1.59,20.24 -0.76,20.24 X1.3 -0.65,20.3 -0.25,20.7 U3.13
pads on no net: J1.1 J1.2 J1.3 J1.4 J1.5 J1.6 J1.9 J1.10 J1.11 J1.12 J1.13 J1.14 J1.19 J1.21 J1.25 J1.27 J1.29 J1.30 J1.31 J1.32 J1.33 J1.34 J1.35 J1.36 J1.37 J1.38 J1.39 J1.40 J1.43 J1.44 J1.47 J1.48 J1.49 J1.50 TR1.8 U3.EP

## Polygon pours and split planes (outlines as drawn)
GND on Bottom Layer "Bottom Layer-GND" (solid, pour order 38): -12.85,0 -4.6,0 -4.6,3.25 cw(c-3.85,3.25) -3.1,3.25 -3.1,0 12.85,0 12.85,2.4 cw(c13.65,2.4) 13.65,3.2 15,3.2 15,12 15,34.5 11,34.5 11,16.002 -11,16.002 -11,34.5 -15,34.5 -15,12 -15,3.2 -13.65,3.2 cw(c-13.65,2.4) -12.85,2.4
GNDISO on Bottom Layer "GNDISO_L04_P034" (solid, remove dead copper, pour order 34): -9.017,30.5 -9.017,17.526 9.017,17.526 9.017,30.5
NOTR on Bottom Layer "Bottom Layer-NOTR" (solid, pour order 27): -9.017,26.797 9.017,26.797 9.017,37.846 -9.017,37.846
GND on Top Layer "Top Layer-GND" (solid, pour order 36): -12.85,0 -4.6,0 -4.6,3.25 cw(c-3.85,3.25) -3.1,3.25 -3.1,0 12.85,0 12.85,2.4 cw(c13.65,2.4) 13.65,3.2 15,3.2 15,18 15,34.5 11,34.5 11,13.208 -11,13.208 -11,34.5 -15,34.5 -15,18 -15,3.2 -13.65,3.2 cw(c-13.65,2.4) -12.85,2.4
GNDISO on Top Layer "GNDISO_L01_P014" (solid, pour order 14): -10.5,27.813 -10.5,13.462 10.5,13.462 10.5,27.813
GNDISO on Int2 "GNDISO_L03_P037" (solid, remove dead copper, pour order 37): -9,30 -9,10 9,10 9,30
NOTR on Int2 "Int2-NOTR" (solid, pour order 31): 9.017,27.813 9.017,43.307 -0.508,43.307 -0.762,43.053 -0.762,36.576 -2.032,35.306 -9.017,35.306 -9.017,27.813
GNDISO on Int1 "GNDISO_L02_P033" (solid, remove dead copper, pour order 33): -9.398,27.305 -9.398,16.256 9.017,16.256 9.017,27.305

## Other copper
Top Layer:
  text "B202AA" at -13.708,42.261 h1
  text "MGA" at 11.114,42.257 h1

## Silkscreen, mask and mechanical layers (free items; w line width, h text height)
Top Overlay:
  drawing of 199 lines, arcs and shapes, not listed
  text "PHASE R" at -6.75,33.5 h0.8 r90
  text "PHASE S" at -4.25,33.5 h0.8 r90
  text "PHASE T" at -1.75,33.5 h0.8 r90
  text "NOTR" at 0.75,33.5 h0.8 r90
  text "CURRENT R" at 3.25,33.5 h0.8 r90
  text "CURRENT S" at 5.75,33.5 h0.8 r90
  text "CURRENT T" at 8.25,33.5 h0.8 r90
  text "https://github.com/akkoyun/MAX78630" at -9,30.55 h0.8
  text "B202 Module is an energy measurement module for poly phase power monitoring systems. It is designed for real-time monitoring for a variety of typical three-phase configurations in industrial applications. For more information please refer to github repo." at -9.5,23.969 h1
Bottom Overlay:
  drawing of 259 lines, arcs and shapes, not listed
  text "PHASE R" at -8.25,44.35 h0.8 r270
  text "PHASE S" at -5.75,44.35 h0.8 r270
  text "PHASE T" at -3.25,44.35 h0.8 r270
  text "NOTR" at -0.75,44.35 h0.8 r270
  text "CURRENT R" at 1.75,44.35 h0.8 r270
  text "CURRENT S" at 4.25,44.35 h0.8 r270
  text "CURRENT T" at 6.75,44.35 h0.8 r270
Top Solder:
  drawing of 2 lines, arcs and shapes, not listed
  text "DANGER HIGH VOLTAGE" at 11.268,33.326 h1.5 r270
  text "DANGER HIGH VOLTAGE" at -11.268,15.674 h1.5 r90
Bottom Solder:
  rectangle: -15,0 15,2.7
  text "DANGER HIGH VOLTAGE" at -11.268,33.326 h1.5 r90
  text "DANGER HIGH VOLTAGE" at 11.268,15.674 h1.5 r270
Board Shape:
  the board outline again, w0.1

## Text inside footprints (layer, text, board x,y; h text height)
J1: Top Overlay "1" at -11.639,3.25 h0.6 r90; Top Overlay "15" at -6.043,3.25 h0.6 r90; Top Overlay "17" at -2.039,3.25 h0.6 r90; Top Overlay "51" at 11.557,3.25 h0.6 r90